# Altium PCB DIOT_Sampler.PCBDOC (part 7 of 8)
Units mm, origin at the board's own origin, x right, y up, seen from the top; angles counter-clockwise.
Board outline 221.17 x 100 mm, 4 copper layers (Top, GP1(GND), L3, Bot), stack 1.648 mm thick; 666 components, 413 nets, 2132 pads, 925 vias.
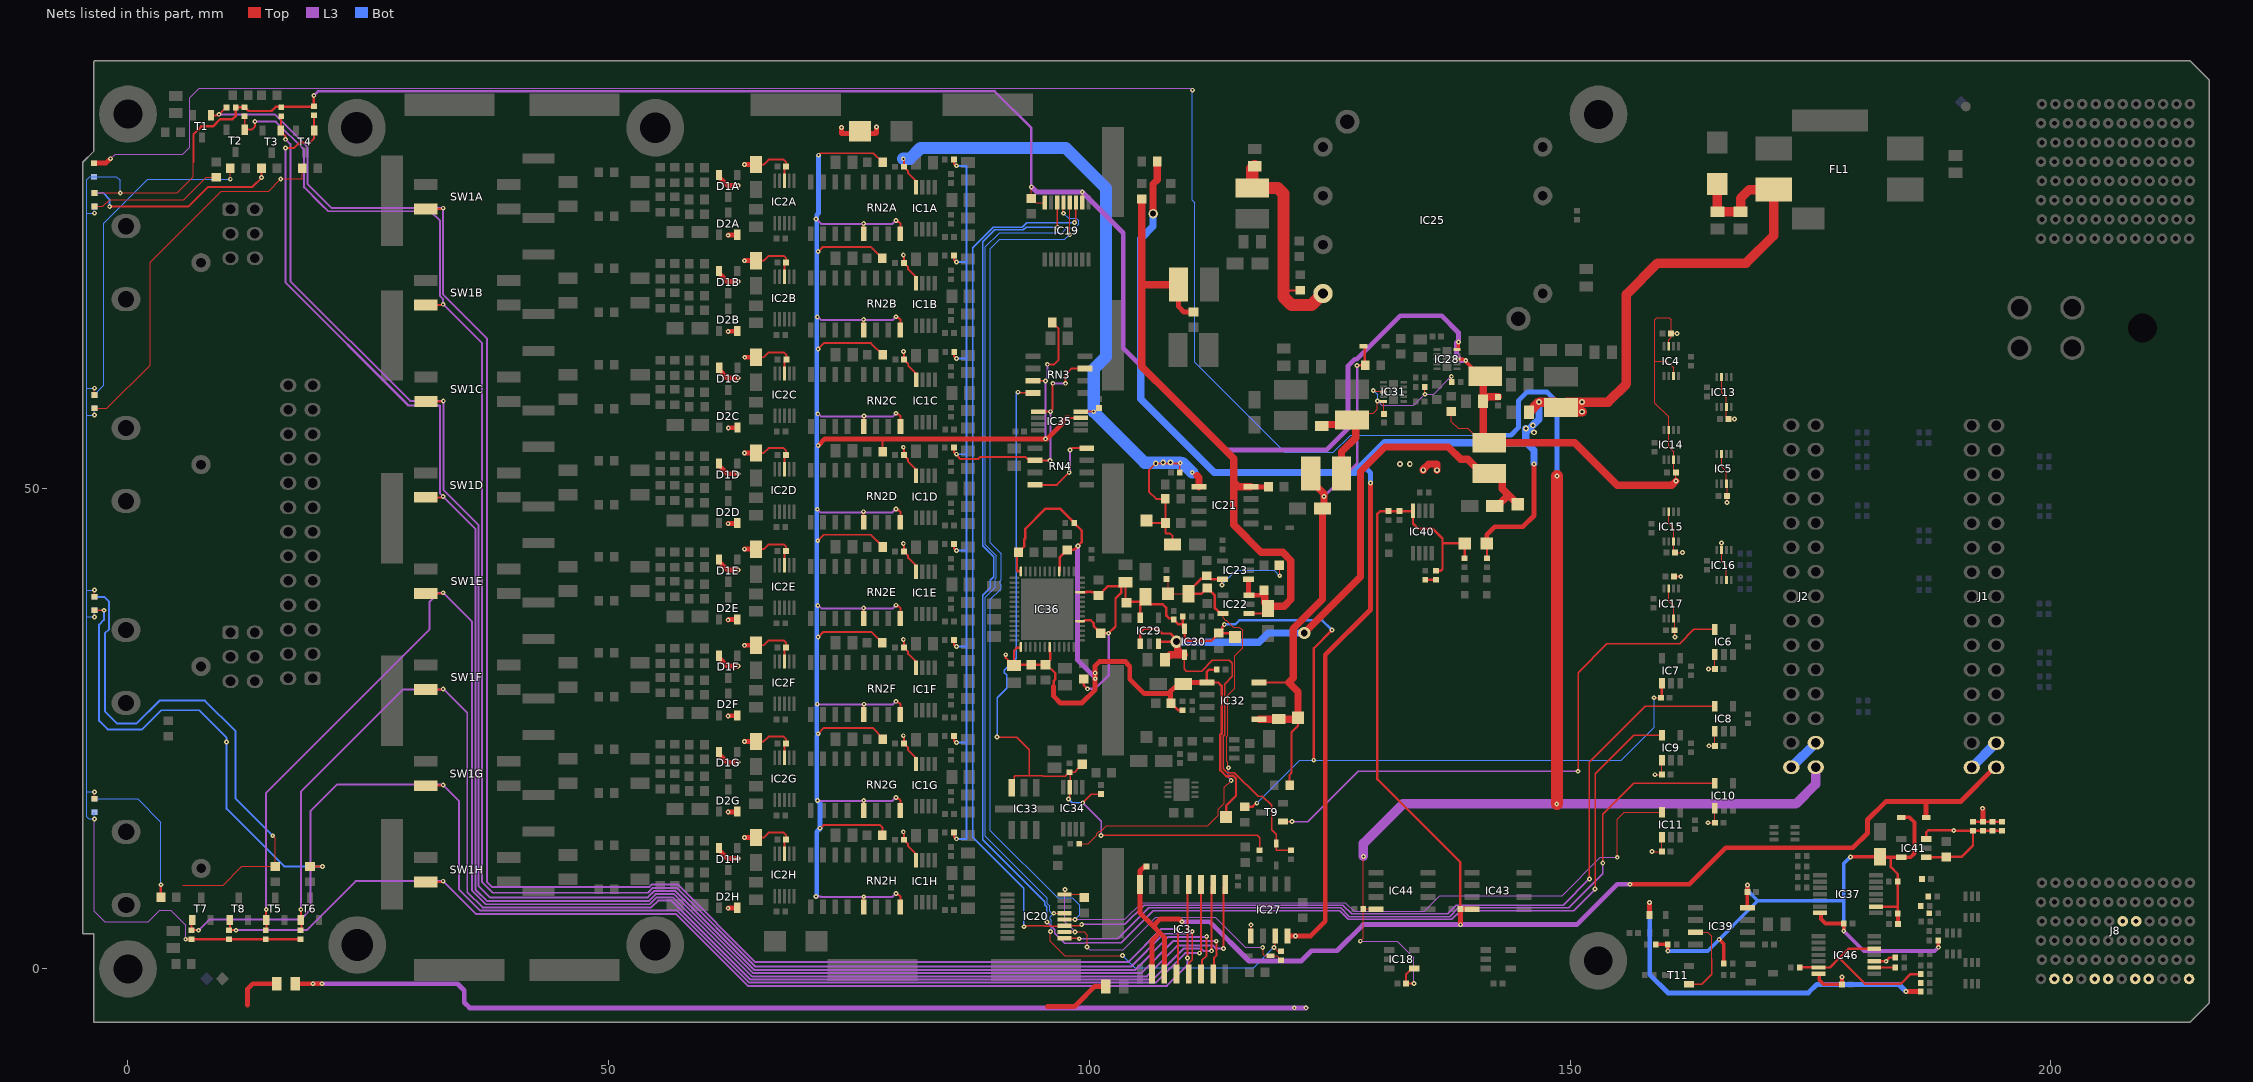
[diagram p8: the nets of this part, all layers, seen from the top]

## Via types
v1: diameter 0.5, hole 0.2, Top to Bot, tented both sides, 704 vias
v2: diameter 0.5, hole 0.2, Top to Bot, 180 vias
v3: diameter 0.6, hole 0.3, Top to Bot, tented both sides, 17 vias
v4: diameter 1, hole 0.6, Top to Bot, tented both sides, 16 vias
v5: diameter 0.6, hole 0.3, Top to Bot, 6 vias
v6: diameter 1.27, hole 0.711, Top to Bot, 2 vias

## Nets (pads, with @x,y where several pads share a name; then routed paths per layer and width w, separated by ;. In a path a pad name is that pad's centre, name@x,y a point inside that pad or via, vN(x,y) a via of type N, cw(c..) or ccw(c..) an arc to the next point about the centre after c; other vN are vias at no path point) (continued)
NetRN4_4: RN4.4 RN4.8 | length 8.3
  Top w0.203: RN4.8@94.319,50.35 96.614,50.35 v1(97.894,51.63) ; v1(97.969,53.955) 98.174,54.16 RN4.4@99.719,54.16
  L3 w0.203: v1(97.894,51.63) 97.969,51.705 v1(97.969,53.955)
O\E\: IC19.13 IC20.13 IC27.7 R65.2 | length 119.1
  Top w0.127: v1(95.944,3.88) 95.944,2.88 97.444,1.38 v1(103.444,1.38) ; v1(96.297,5.787) IC20.13@97.399,5.787 ; v1(97.304,78.595) IC19.13@97.304,79.697 ; IC27.7@119.329,3.43 119.329,2.365 v1(119.194,2.23) 119.574,1.85 R65.2@119.944,1.85
  Bot w0.127: v1(95.944,3.88) 96.025,3.961 96.025,5.062 95.944,5.144 95.944,5.434 v1(96.297,5.787) 96.037,5.787 95.852,5.972 95.852,6.55 95.602,6.799 95.602,7.362 89.186,13.779 89.186,38.635 90.223,39.672 90.223,40.597 90.321,40.696 90.321,42.974 89.186,44.109 89.186,56.879 89.189,56.882 89.189,57.478 89.186,57.481 89.186,75.122 90.648,76.584 97.166,76.584 97.656,77.074 98.511,77.074 98.885,77.448 98.885,77.812 98.626,78.07 97.828,78.07 v1(97.304,78.595) ; v1(103.444,1.38) 104.694,0.13 117.094,0.13 v1(119.194,2.23)
P2V5A: C16.2 C71.2 C75.2 C76.2 C77.1 C92.2 C93.2 C94.2 IC7.1 IC29.5 IC30.5 IC36.31 IC36.37 R70.2 R76.1 R77.1 TP10.1 | length 121.9
  Top w0.127: v2(158.725,28.2) C16.2@159.45,28.2
  Top w0.254: IC36.31@99.039,36.165 99.394,36.165 99.49,36.261 100.133,36.261 100.428,35.966 100.428,35.671 C93.2@101.194,34.905 v1(101.994,34.905) 102.713,35.624 102.713,38.54 103.329,39.155 C94.2@103.329,39.807 ; IC36.37@99.039,39.165 99.68,39.165 99.76,39.246 100.178,39.246 100.258,39.165 100.609,39.165 C92.2@100.944,38.83 100.969,38.83 101.946,39.807 C94.2@103.329,39.807 ; R77.1@99.394,30.155 99.394,29.53 v1(99.794,29.13) ; IC29.5@105.294,36.532 105.294,37.896 C77.1@105.817,38.419 ; C77.1@105.817,38.694 C77.1@105.817,38.663 ; R70.2@109.724,36.63 IC30.5@109.724,35.83 ; v1(114.032,35.83) 114.032,35.763 113.817,35.548 113.817,35.253 C75.2@113.469,34.905 ; TP10.1@115.136,34.52 114.751,34.905 C75.2@113.469,34.905 ; R76.1@116.159,16.864 116.974,16.864 117.346,17.236 v1(117.412,17.236) ; v2(123.328,21.704) 123.344,21.72 123.344,33.352 v2(125.226,35.234) ; C16.2@159.55,28.2 IC7.1@159.55,29.7 ; C94.2@103.329,39.807 C94.2@103.752,40.23 103.752,38.165 105.319,38.165 C77.1@105.817,38.663 ; C77.1@105.817,38.419 C77.1@105.817,38.663 ; C77.1@105.817,38.419 106.315,37.921 107.617,37.921 107.998,37.541 107.998,36.749 108.273,36.474 108.619,36.474 C76.2@108.771,36.322 109.263,35.83 IC30.5@109.724,35.83 ; IC30.5@109.724,35.83 109.724,35.55 IC30.5@109.895,35.379 109.895,34.429 110.194,34.13 112.694,34.13 C75.2@113.469,34.905
  L3 w0.254: v1(99.794,29.13) 100.594,29.13 101.994,30.53 v1(101.994,34.905)
  Bot w0.127: v1(117.412,17.236) 121.881,21.704 v2(123.328,21.704) 155.304,21.704 158.725,25.125 v2(158.725,28.2)
  Bot w0.254: v1(114.032,35.83) 115.169,35.83 115.594,36.255 124.205,36.255 v2(125.226,35.234)
P3V3: C17.2 C18.2 C19.2 C20.2 C21.2 C22.2 C23.2 C24.2 C25.2 C27.2 C28.2 C30.2 C32.2 C33.2 C69.2 C70.2 C123.2 D3.2 D4.2 D9.1 D19.2 D20.2 D21.2 D23.2 D24.2 D25.2 D26.2 IC4.3 IC4.7 IC5.3 IC5.7 IC6.1 IC8.1 IC9.1 IC10.1 IC11.1 IC13.3 IC13.7 IC14.3 IC14.7 IC15.3 IC15.7 IC16.3 IC16.7 IC17.3 IC17.7 IC19.10 IC19.16 IC20.10 IC20.16 IC27.5 IC28.8 IC28.10 IC46.14 L7.2 L8.1 R25.1 R27.1 R29.1 R31.1 R33.1 R36.1 R39.1 R43.1 R65.1 R66.2 | length 457.6
  Top w0.127: D26.2@-3.49,17.7 v2(-3.49,18.4) ; D23.2@-3.49,38.7 v2(-3.49,39.4) ; D20.2@-3.49,59.7 v2(-3.49,60.4) ; D3.2@-3.49,80.7 v2(-0.8,80.7) 5.1,80.7 6.814,82.414 6.814,83.952 ; v1(93.957,81.336) C32.2@93.957,80.136 94.396,79.697 IC19.16@95.354,79.697 ; IC20.10@97.399,3.837 v1(98.501,3.837) 99.437,3.837 99.769,3.505 99.769,2.305 v1(99.744,2.28) ; v1(97.444,8.262) 97.444,7.782 IC20.16@97.399,7.737 99.137,7.737 C33.2@99.444,7.43 ; IC19.10@99.254,79.697 v1(99.254,80.799) ; v1(118.019,2.23) 118.059,2.19 118.059,1.515 118.194,1.38 D9.1@118.834,1.38 119.474,1.38 R65.1@119.944,0.91 ; R66.2@138.077,57.583 137.691,57.97 R66.2@137.641,57.97 137.641,56.909 138.345,56.205 139.344,56.205 140.821,54.729 141.567,54.729 L8.1@141.571,54.729 ; v2(158.5,12.2) C18.2@159.55,12.2 IC11.1@159.55,13.7 ; v2(158.825,20.2) C20.2@159.55,20.2 IC9.1@159.55,21.7 ; IC17.7@160.25,39.55 160.25,38.25 160.75,37.75 IC17.3@160.75,36.45 160.867,36.333 C27.2@160.867,35.222 160.867,34.558 v1(160.9,34.525) ; IC15.7@160.25,47.55 160.246,47.546 160.246,46.305 160.75,45.801 IC15.3@160.75,44.45 160.75,43.415 160.917,43.247 160.976,43.305 v1(161.675,43.305) ; IC4.3@160.25,64.75 160.25,65.45 160.5,65.7 C23.2@160.5,66.1 ; IC4.7@160.75,61.65 160.75,62.5 160.05,63.2 158.825,63.2 ; v1(161.002,50.736) 161.002,51.606 C30.2@160.988,51.62 160.75,51.859 IC14.3@160.75,52.95 160.75,53.787 160.25,54.287 IC14.7@160.25,56.05 160.25,57.4 158.825,58.825 158.825,63.2 ; v2(161.1,66.1) C23.2@160.5,66.1 ; v2(164.325,15.2) C19.2@165.05,15.2 IC10.1@165.05,16.7 ; v2(164.4,31.2) C17.2@165.05,31.2 IC6.1@165.05,32.7 ; v2(164.45,23.2) C21.2@165.05,23.2 IC8.1@165.05,24.7 ; v1(165.75,44.308) IC16.7@165.75,43.55 165.746,43.546 165.746,42.382 166.25,41.878 IC16.3@166.25,40.45 ; IC5.7@165.75,53.55 165.75,52.25 166.25,51.75 IC5.3@166.25,50.45 166.318,50.383 C22.2@166.318,49.188 v2(166.318,48.518) ; IC13.7@165.75,61.55 165.75,59.9 166.25,59.4 IC13.3@166.25,58.45 166.25,57.399 C28.2@166.464,57.185 v2(167.094,57.185) ; 158.825,63.2 158.825,67.525 159.025,67.725 160.3,67.725 160.5,67.525 C23.2@160.5,66.1
  Top w0.152: IC27.5@116.789,3.43 116.794,3.435 v1(116.794,4.58)
  Top w0.203: C25.2@160.821,40.818 C25.2@160.823,40.818 v2(161.499,40.818)
  Top w0.254: v2(6,3.08) R39.1@6.63,3.08 R43.1@10.53,3.08 R33.1@14.33,3.08 R36.1@17.93,3.08 ; 6.814,83.952 6.814,86.809 7.635,87.63 8.847,87.63 9.593,88.376 10.89,88.376 11.219,88.705 11.219,89.575 R25.1@11.189,89.605 ; R25.1@11.189,89.625 R27.1@12.144,89.625 12.54,89.229 14.943,89.229 15.389,89.675 R31.1@19.33,89.675 ; R31.1@19.33,89.72 v1(19.33,90.85)
  Top w0.381: IC28.8@138.242,63.415 138.885,63.415 ; IC28.10@138.242,64.415 138.378,64.55 v1(138.378,65.215) ; v1@139.085,63.215 140.665,61.635 L7.2@141.165,61.635 ; IC46.14@175.831,-0.508 175.922,-0.598 175.922,-1.148 176.389,-1.615 C123.2@178.281,-1.615 ; v2(178.281,-0.848) C123.2@178.281,-1.615 ; C123.2@178.289,-1.615 C123.2@178.281,-1.615
  Top w0.762: v3(134.726,51.872) 134.726,51.95 135.28,52.505 136.149,52.505 v3(136.149,51.872) ; L7.2@141.165,61.635 140.948,61.417 C70.2@140.948,59.018 ; L8.1@141.567,54.729 140.948,55.348 C70.2@140.948,59.018 ; L8.1@141.571,54.729 150.472,54.729 154.901,50.3 160.566,50.3 v1(161.002,50.736) ; C69.2@142.512,59.494 141.423,59.494 C70.2@140.948,59.018
  L3 w0.127: v2(-3.49,15.6) -3.49,5.99 -2.4,4.9 2.1,4.9 3.295,6.095 4.448,6.095 6,4.543 v2(6,3.08) ; v1(97.444,8.262) 97.444,4.984 97.399,4.939 v1(98.501,3.837) ; v1(99.744,2.28) 100.05,1.974 103.523,1.974 106.898,5.349 113.1,5.349 116.219,2.23 v1(118.019,2.23)
  L3 w0.254: v1(19.33,90.85) 19.753,91.273 20.337,91.273 90.151,91.273 93.957,87.467 v1(93.957,81.336)
  L3 w0.508: v1@93.972,81.352 94.525,80.799 v1(99.254,80.799) 103.513,76.54 103.513,64.569 114.127,53.955 124.644,53.955 126.91,56.221 126.91,62.731 127.579,63.401 127.809,63.401 132.343,67.935 136.631,67.935 138.378,66.187 v1(138.378,65.215) ; v1@138.181,65.178 138.181,63.753 138.657,63.277 139.133,63.277 v1(139.141,63.27)
  Bot w0.127: D25.2@-3.49,16.3 v2(-3.49,15.6) -4.1,15.6 -4.3,15.8 -4.3,18.4 ; v2(-3.49,18.4) -4.3,18.4 ; D21.2@-3.49,37.3 v2(-3.49,36.6) -4.3,36.6 ; v2(-3.49,39.4) -4.3,39.4 ; D4.2@-3.49,58.3 v2(-3.49,57.6) -4.3,57.6 ; v2(-3.49,60.4) -4.3,60.4 ; D19.2@-3.49,79.3 v2(-3.49,78.6) -4.3,78.6 ; v2(-0.8,80.7) -0.8,82 -1.2,82.4 D24.2@-3.52,82.4 -4,82.4 -4.3,82.1 -4.3,78.6 ; -4.3,18.4 -4.3,36.6 ; -4.3,36.6 -4.3,39.4 ; -4.3,39.4 -4.3,57.6 ; -4.3,57.6 -4.3,60.4 ; -4.3,60.4 -4.3,78.6
  other v3: 132.299,52.505 133.328,52.505
P3V3_DIOT: C108.2 C110.2 C118.1 D17.2 IC37.2 IC37.14 IC39.8 IC41.5 R102.2 R103.2 R104.1 R107.1 R109.1 R110.1 R113.1 | length 74.5
  Top w0.254: IC37.2@181.801,6.475 184.071,6.475 ; 183.355,11.6 183.355,10.582 184.071,9.866 R109.1@184.071,9.075 184.071,6.475 ; R103.2@184.071,5.775 184.071,6.475
  Top w0.381: R113.1@158.96,2.49 R113.1@158.9,2.55 R110.1@160.16,2.55 v2(160.16,1.86) ; v2(165.501,3.074) 165.96,2.616 R102.2@165.96,0.55 ; IC39.8@168.435,6.35 IC39.8@168.43,6.355 168.43,7.98 C110.2@168.45,8 v2(168.45,8.725) ; IC37.14@176.001,5.825 176.091,5.734 176.091,5.185 176.559,4.718 C108.2@178.458,4.718 v2(178.458,3.95) ; v2(179.15,11.65) C118.1@182.23,11.65 182.28,11.6 183.355,11.6 IC41.5@184.43,11.6 185.397,11.6 185.807,12.01 185.807,15.253 185.306,15.754 D17.2@184.43,15.754 ; R103.2@184.071,5.775 184.1,5.746 R107.1@184.1,4.65 ; v2(188.3,2.245) R104.1@188.3,2.95
  L3 w0.381: v2(178.458,3.95) 180.548,1.86 187.915,1.86 v2(188.3,2.245)
  Bot w0.381: v2(160.16,1.86) 164.301,1.86 169.516,7.075 ; v2(168.45,8.725) 168.45,8.141 169.516,7.075 ; v2(178.458,3.95) 178.458,7.075 ; v2(179.15,11.65) 178.458,10.958 178.458,7.075 ; 169.516,7.075 178.458,7.075
P3V3_MP: C15.2 C113.2 C120.2 D17.1 IC3.2 IC3.3 IC3.16 IC40.8 IC43.8 J1.30 R114.2 R115.2 R119.2 TP15.1 | length 182.2
  Top w0.254: C113.2@132.21,47.62 R114.2@131.13,47.62 130.251,47.62 129.95,47.319 129.95,19.722 138.58,11.092 C120.2@138.58,6.25 C120.2@138.58,6.245 ; C113.2@132.23,47.6 133.605,47.6 IC40.8@133.655,47.65 133.655,46.325 134.192,45.789 135.677,45.789 136.722,44.744 136.722,44.271 ; R115.2@136.03,41.42 136.564,41.42 136.722,41.578 136.722,44.271 ; R119.2@139.03,42.72 TP15.1@139.03,44.25 136.744,44.25 136.722,44.271
  Top w0.508: C15.2@105.919,10.63 105.701,10.63 105.249,10.178 IC3.16@105.249,8.78 105.249,5.825 106.619,4.455 ; IC3.2@106.519,-0.52 106.519,2.955 107.319,3.755 ; IC3.3@107.789,-0.52 107.789,3.285 107.319,3.755 ; v1(109.619,4.905) 109.319,5.205 107.369,5.205 106.619,4.455 ; v2(138.58,4.598) 138.58,6.245 IC43.8@140.03,6.245 ; v2(156.227,8.8) 162.4,8.8 166.2,12.6 179.4,12.6 180.925,14.125 180.925,15.5 182.825,17.4 187.03,17.4 ; D17.1@187.03,15.754 187.03,17.4 ; J1.30@194.312,20.95 194.15,20.95 190.6,17.4 187.03,17.4 ; 106.619,4.455 107.319,3.755
  L3 w0.508: v1(109.619,4.905) 112.519,4.905 116.602,0.822 122.04,0.822 123.098,1.88 125.747,1.88 128.466,4.598 v2(138.58,4.598) 150.698,4.598 154.9,8.8 v2(156.227,8.8)
P3V3_MP2: C121.2 C122.2 D22.2 IC18.4 IC44.8 J2.30 | length 311.9
  Top w0.127: v2(128.173,2.88) 128.48,3.187 C122.2@128.48,6.25 ; v2(128.5,11.7) 128.48,11.68 C122.2@128.48,6.25 ; IC44.8@129.867,6.245 129.867,6.25 C122.2@128.48,6.25
  Top w0.203: v2(133.752,-1.507) 133.65,-1.507 133.65,-1.5 C121.2@132.95,-1.5 132.95,-0.55 133.55,0.05 IC18.4@133.8,0.05
  Top w0.508: D22.2@-3.52,83.8 -2.291,83.8 v2(-1.825,84.266)
  Top w1.27: v2@148.63,17.157 v2(148.63,51.25)
  L3 w0.127: v2(-1.825,84.266) -1.341,84.75 5.675,84.75 6.4,85.475 6.4,90.6 7.39,91.59 20.611,91.59 110.507,91.591 v1(110.707,91.391) ; v2(128.173,2.88) 132.02,2.88 133.752,1.148 v2(133.752,-1.507)
  L3 w1: v2(128.5,11.7) 128.5,13.05 132.607,17.157 v2(148.603,17.157) 173.468,17.157 175.542,19.231 J2.30@175.542,20.976
  Bot w0.127: v1(110.707,91.391) 110.707,79.93 110.944,79.693 110.944,63.08 120.294,53.73 125.381,53.73 127.156,55.505 140.783,55.505
  Bot w0.508: 140.783,55.505 143.847,55.505 144.62,56.278 144.62,59.088 145.552,60.02 147.578,60.02 148.648,58.95 148.648,51.268 v2(148.63,51.25)
P3V3A: C67.1 C68.2 D7.1 IC29.1 IC29.3 IC30.1 L8.2 R60.2 TP11.1 | length 98.2
  Top w0.152: IC30.1@109.895,32.679 109.869,32.654 109.869,31.194 110.083,30.98 111.695,30.98 112.795,32.08 114.569,32.08 114.869,31.78 114.869,30.42 114.077,29.628 114.077,24.335 113.941,24.198 113.941,20.803 114.323,20.42 115.087,20.42 117.549,17.959 117.99,17.959 118.94,17.009 118.94,14.484 119.444,13.98 D7.1@119.444,13.02 119.444,12.38 119.474,12.35 R60.2@120.944,12.35
  Top w0.254: IC29.1@105.294,33.832 105.294,34.994 105.681,35.381 107.037,35.381 107.538,34.88 108.425,34.88 109.059,34.246 v6(109.059,34.035) 107.342,34.035 107.194,33.887 IC29.3@107.194,33.832
  Top w0.762: C68.2@107.844,32.13 108.393,32.679 109.369,32.679 ; v6(109.059,34.035) 109.156,33.937 109.156,33.198 109.369,32.985 109.369,32.679 ; IC30.1@109.895,32.679 109.369,32.679 ; v6(122.345,34.932) 128.196,40.782 128.196,51.726 130.75,54.28 137.33,54.28 138.611,52.999 139.35,52.999 140.821,51.529 L8.2@141.571,51.529 142.321,51.529 142.94,50.91 142.94,49.948 143.558,49.33 ; C67.1@142.169,48.164 142.444,48.164 143.558,49.277 143.558,49.33 ; TP11.1@144.558,48.33 143.558,49.33
  Bot w0.762: v6(109.059,34.035) 109.114,33.98 117.641,33.98 118.593,34.932 v6(122.345,34.932)
P5V0A: C82.2 C83.2 C84.1 C87.2 C88.2 C89.2 C90.2 C91.2 IC32.1 IC36.15 IC36.21 IC36.44 IC36.52 R73.2 R78.2 TP13.1 | length 90.4
  Top w0.254: v1(91.294,32.68) 91.294,32.365 92.102,31.557 C91.2@92.155,31.557 ; C90.2@92.465,43.33 92.465,41.409 92.534,41.34 IC36.52@92.864,41.34 ; C90.2@92.619,43.33 93.244,43.955 93.244,44.68 93.344,44.78 93.344,45.78 95.444,47.88 96.944,47.88 98.414,46.41 R78.2@98.414,46.38 99.198,45.596 99.198,44.384 v1(98.796,43.982) 98.394,43.58 C88.2@97.694,43.58 96.894,42.78 96.894,41.37 IC36.44@96.864,41.34 ; IC36.15@92.864,33.49 92.754,33.38 92.444,33.38 92.155,33.091 C91.2@92.155,31.557 ; IC36.21@95.864,33.49 95.864,32.948 95.944,32.867 95.944,32.147 95.498,31.701 C87.2@95.432,31.635 ; 96.269,29.358 96.269,29.93 96.444,30.105 96.444,30.755 95.564,31.635 C87.2@95.432,31.635 ; C82.2@108.494,27.63 109.214,26.91 R73.2@109.694,26.91 ; C83.2@113.244,31.13 112.444,31.13 112.194,30.88 112.194,29.835 IC32.1@112.244,29.785 113.4,29.785 113.747,29.438 113.747,24.472 113.611,24.335 113.611,20.666 114.238,20.039 114.482,20.039 114.533,20.09 114.95,20.09 115.246,19.795 115.246,18.002 114.238,16.994 114.238,15.823 TP13.1@114.206,15.792 ; C91.2@92.155,31.557 92.233,31.635 C89.2@93.933,31.635 C87.2@95.432,31.635
  Top w0.508: 96.269,29.358 96.269,28.35 96.964,27.655 99.211,27.655 100.597,29.041 100.597,30.179 v1(100.597,30.787) 100.597,31.533 101.025,31.961 103.752,31.961 103.975,31.738 103.975,31.674 104.194,31.455 104.194,30.13 105.7,28.624 108.202,28.624 108.425,28.847 ; C82.2@108.494,27.63 108.425,27.699 108.425,28.624 108.425,28.847 ; IC32.1@112.244,29.785 109.899,29.785 109.373,29.259 108.837,29.259 108.425,28.847
  L3 w0.508: v1(98.796,43.982) 98.744,43.93 98.744,32.14 100.597,30.287 v1@100.597,30.13
  other v1: 100.607,30.179
P6V0: C78.2 C79.2 IC31.8 IC31.10 L9.2 L10.1 R69.2 R72.2 | length 28.2
  Top w0.127: L9.2@127.547,57.113 127.547,57.79 129.523,57.79 129.95,58.217 v1@129.95,58.979 ; v1(129.523,60.17) 129.594,60.098 130.229,60.098 130.241,60.087 130.241,60.055 130.556,60.055 IC31.8@130.591,60.02 ; v1@130.209,59.02 IC31.10@130.591,59.02 130.591,57.72 C78.2@130.641,57.72 ; R72.2@134.861,60.52 134.861,59.8 v1(134.891,59.77) ; v1(137.641,61.615) 137.671,61.585 R69.2@137.671,61.02
  Top w0.762: C79.2@124.161,56.47 124.305,56.614 126.695,56.614 L9.2@127.176,57.095 ; L10.1@126.226,51.53 126.226,53.779 127.694,55.247 127.694,56.929 L9.2@127.529,57.095
  L3 w0.127: v1@129.991,59.02 130.406,58.604 133.725,58.604 v1(134.891,59.77) 135.796,59.77 v1(137.641,61.615)
  Bot w0.127: v1(129.523,60.17) 129.976,59.717 v1(129.976,59.058)
P6V0A: C80.1 C81.2 D8.1 IC32.5 IC32.8 L10.2 R53.2 R64.2 TP12.1 | length 60
  Top w0.203: IC32.8@117.644,29.785 120.51,29.785 ; R53.2@120.819,19.08 120.819,20.18 121.019,20.38 121.019,24.605 121.694,25.28 TP12.1@121.694,26.13
  Top w0.254: v1(127.841,62.77) R64.2@128.648,62.77 ; D8.1@128.501,64.77 128.545,64.77 128.648,64.667 128.648,62.838 R64.2@128.691,62.795
  Top w0.762: IC32.5@117.644,25.975 C81.2@119.694,25.975 ; C81.2@119.694,25.98 C81.2@119.694,25.975 ; L10.2@123.026,51.53 123.026,50.774 124.394,49.406 v1(124.394,49.13) 124.394,48.03 C80.1@124.244,47.88 ; C80.1@124.244,47.636 124.244,38.447 121.202,35.405 121.202,30.26 120.727,29.785 121.694,28.818 TP12.1@121.694,26.13 121.539,25.975 C81.2@119.694,25.975
  L3 w0.254: v1(124.394,49.13) 127.841,52.577 v1(127.841,62.77)
P12V0: C57.2 C114.2 C115.2 D16.1 FL1.2 IC27.8 J1.28 J1.29 J2.28 J2.29 L4.1 R86.2 R100.2 R118.2 R154.2 R155.2 R156.2 TP14.1 | length 213.3
  Top w0.203: R118.2@141.33,42.72 TP14.1@141.33,44.25
  Top w0.254: R156.2@191.899,15.311 R155.2@192.92,15.311 R154.2@193.942,15.311 R100.2@194.94,15.311
  Top w0.508: IC27.8@120.599,3.43 v2(121.439,3.43) 123.01,3.43 124.53,4.95 124.53,32.656 129.23,37.356 v2(129.23,50.55) ; TP14.1@141.33,44.25 141.33,45.143 142.169,45.983 145.091,45.983 146.244,47.136 v2(146.244,52.505) ; v2(192.9,16.7) 192.92,16.68 R155.2@192.92,15.311
  Top w0.762: v4(106.619,78.555) 106.619,81.63 107.044,82.055 R86.2@107.044,83.98
  Top w1: C57.2@145.704,57.872 146.782,58.95 148.493,58.95 L4.1@149.048,58.395 ; v3(151.23,57.95) 149.493,57.95 L4.1@149.048,58.395 ; D16.1@165.3,81.65 165.3,78.78 C114.2@165.33,78.75 C115.2@167.73,78.75 167.73,80.15 168.63,81.05 FL1.2@171.175,81.05 171.175,76.275 168.3,73.4 159.1,73.4 155.85,70.15 155.85,60.85 153.95,58.95 v3(151.23,58.95) 149.603,58.95 L4.1@149.048,58.395
  Bot w0.508: 128.394,52.43 129.23,51.594 v2(129.23,50.55)
  Bot w0.762: v4(106.619,78.555) 106.619,77.244 105.325,75.95 105.325,59.275 106.475,58.125 112.97,51.63 120.494,51.63 127.594,51.63 128.394,52.43 130.693,54.729 145.461,54.729 146.244,53.946 v2(146.244,52.505) ; 145.394,54.729 v3(145.394,56.205) ; v3@145.594,56.005 145.894,56.305 ; v3(146.119,56.53) 146.769,57.18 v3(146.769,58.95)
  Bot w1: J2.29@173.002,20.976 J2.28@175.542,23.516 ; J1.29@191.772,20.95 J1.28@194.312,23.49
  other v3: 146.244,55.805
P12V0_DIOT: C117.2 IC41.1 IC41.3 J8.A1 J8.D1 J8.E1 J8.G1 J8.H1 J8.J1 J8.K1 R100.1 R154.1 R155.1 R156.1 | length 15.6
  Top w0.254: IC41.1@187.03,11.6 189.08,11.6 C117.2@189.13,11.65 190.716,11.65 191.899,12.833 R156.1@191.899,14.371 ; IC41.3@187.03,13.5 187.03,14.182 187.248,14.4 v2(189.9,14.4) 189.929,14.371 R156.1@191.899,14.371 ; R100.1@194.94,14.371 R154.1@193.942,14.371 R155.1@192.92,14.371 R156.1@191.899,14.371
P12V0A: C8A.1 C8B.1 C8C.1 C8D.1 C8E.1 C8F.1 C8G.1 C8H.1 C9A.2 C9B.2 C9C.2 C9D.2 C9E.2 C9F.2 C9G.2 C9H.2 C13A.2 C13B.2 C13C.2 C13D.2 C13E.2 C13F.2 C13G.2 C13H.2 C38.1 C39.2 C40.2 C104.2 D1A.2 D1B.2 D1C.2 D1D.2 D1E.2 D1F.2 D1G.2 D1H.2 D2A.2 D2B.2 D2C.2 D2D.2 D2E.2 D2F.2 D2G.2 D2H.2 D5.1 IC1A.8 IC1B.8 IC1C.8 IC1D.8 IC1E.8 IC1F.8 IC1G.8 IC1H.8 IC2A.8 IC2B.8 IC2C.8 IC2D.8 IC2E.8 IC2F.8 IC2G.8 IC2H.8 IC21.1 IC35.8 R51.2 TP7.1 | length 193.8
  Top w0.203: C8H.1@65.329,13.658 66.129,13.658 66.632,14.161 68.199,14.161 68.465,13.895 C9H.2@68.465,13.448 68.275,13.258 IC2H.8@68.275,11.967 ; C8G.1@65.329,23.658 66.129,23.658 66.632,24.161 68.199,24.161 68.465,23.895 C9G.2@68.465,23.448 68.275,23.258 IC2G.8@68.275,21.967 ; C8F.1@65.329,33.658 66.129,33.658 66.632,34.161 68.199,34.161 68.465,33.895 C9F.2@68.465,33.448 68.275,33.258 IC2F.8@68.275,31.967 ; C8E.1@65.329,43.658 66.129,43.658 66.632,44.161 68.199,44.161 68.465,43.895 C9E.2@68.465,43.448 68.275,43.258 IC2E.8@68.275,41.967 ; C8D.1@65.329,53.658 66.129,53.658 66.632,54.161 68.199,54.161 68.465,53.895 C9D.2@68.465,53.448 68.275,53.258 IC2D.8@68.275,51.967 ; C8B.1@65.329,73.658 66.129,73.658 66.632,74.161 68.199,74.161 68.465,73.895 C9B.2@68.465,73.448 68.275,73.258 IC2B.8@68.275,71.967 ; C8A.1@65.329,83.658 66.129,83.658 66.632,84.161 68.199,84.161 68.465,83.895 C9A.2@68.465,83.448 68.275,83.258 IC2A.8@68.275,81.967 ; C8C.1@65.341,63.614 66.141,63.614 66.645,64.117 68.212,64.117 68.478,63.851 C9C.2@68.478,63.404 68.288,63.214 IC2C.8@68.288,61.923 ; v1(80.644,14.255) 80.694,14.205 C13H.2@80.694,13.43 81.144,12.98 81.144,12.755 81.969,11.93 IC1H.8@81.969,11.309 ; v1(80.644,24.255) 80.694,24.205 C13G.2@80.694,23.43 81.144,22.98 81.144,22.755 81.969,21.93 IC1G.8@81.969,21.309 ; v1(80.644,34.255) 80.694,34.205 C13F.2@80.694,33.43 81.144,32.98 81.144,32.755 81.969,31.93 IC1F.8@81.969,31.309 ; v1(80.644,44.255) 80.694,44.205 C13E.2@80.694,43.43 81.144,42.98 81.144,42.755 81.969,41.93 IC1E.8@81.969,41.309 ; v1(80.644,54.255) 80.694,54.205 C13D.2@80.694,53.43 81.144,52.98 81.144,52.755 81.969,51.93 IC1D.8@81.969,51.309 ; v1(80.644,74.255) 80.694,74.205 C13B.2@80.694,73.43 81.144,72.98 81.144,72.755 81.969,71.93 IC1B.8@81.969,71.309 ; v1(80.644,84.255) 80.694,84.205 C13A.2@80.694,83.43 81.144,82.98 81.144,82.755 81.969,81.93 IC1A.8@81.969,81.309 ; v1(80.657,64.211) 80.707,64.161 C13C.2@80.707,63.386 81.157,62.936 81.157,62.711 81.982,61.886 IC1C.8@81.982,61.265 ; IC35.8@99.094,57.955 v1(100.444,57.955) 100.619,57.955 C104.2@101.019,58.355 ; TP7.1@105.944,46.63 106.194,46.38 C40.2@107.894,46.38 ; C38.1@108.644,44.13 108.644,45.03 108.394,45.28 107.994,45.28 107.894,45.38 C40.2@107.894,46.38 ; C39.2@109.394,51.63 109.394,52.58 v3(106.894,52.58) 106.194,51.88 106.194,49.63 106.944,48.88 R51.2@107.894,48.88 C40.2@107.894,46.38 ; v1(110.694,51.63) 111.132,51.192
  Top w0.508: D1H.2@61.483,12.568 61.483,12.338 62.327,11.494 v1(63.457,11.494) ; D1G.2@61.483,22.568 61.483,22.338 62.327,21.494 v1(63.457,21.494) ; D1F.2@61.483,32.568 61.483,32.338 62.327,31.494 v1(63.457,31.494) ; D1E.2@61.483,42.568 61.483,42.338 62.327,41.494 v1(63.457,41.494) ; D1D.2@61.483,52.568 61.483,52.338 62.327,51.494 v1(63.457,51.494) ; D1B.2@61.483,72.568 61.483,72.338 62.327,71.494 v1(63.457,71.494) ; D1A.2@61.483,82.568 61.483,82.338 62.327,81.494 v1(63.457,81.494) ; D1C.2@61.496,62.524 61.496,62.294 62.339,61.45 v1(63.47,61.45) ; v1(62.428,6.304) 62.446,6.322 D2H.2@63.338,6.322 ; v1(62.428,16.304) 62.446,16.322 D2G.2@63.338,16.322 ; v1(62.428,26.304) 62.446,26.322 D2F.2@63.338,26.322 ; v1(62.428,36.304) 62.446,36.322 D2E.2@63.338,36.322 ; v1(62.428,46.304) 62.446,46.322 D2D.2@63.338,46.322 ; v1(62.428,66.304) 62.446,66.322 D2B.2@63.338,66.322 ; v1(62.428,76.304) 62.446,76.322 D2A.2@63.338,76.322 ; v1(62.44,56.26) 62.459,56.278 D2C.2@63.35,56.278 ; v1(64.135,13.653) 64.14,13.658 C8H.1@65.329,13.658 ; v1(64.135,23.653) 64.14,23.658 C8G.1@65.329,23.658 ; v1(64.135,33.653) 64.14,33.658 C8F.1@65.329,33.658 ; v1(64.135,43.653) 64.14,43.658 C8E.1@65.329,43.658 ; v1(64.135,53.653) 64.14,53.658 C8D.1@65.329,53.658 ; v1(64.135,73.653) 64.14,73.658 C8B.1@65.329,73.658 ; v1(64.135,83.653) 64.14,83.658 C8A.1@65.329,83.658 ; v1(64.148,63.609) 64.152,63.614 C8C.1@65.341,63.614 ; v1(74.22,87.498) 74.22,86.88 77.776,86.88 77.852,86.956 v1(77.852,87.549)
  Top w0.762: 111.219,51.28 111.393,51.106 IC21.1@111.393,50.134
  Bot w1.27: v1(80.644,84.255) 81.319,84.255 82.444,85.38 97.544,85.38 101.725,81.199 101.725,63.661 100.444,62.38 v1(100.444,57.955) 105.757,52.642 106.894,52.642 107.669,52.642 108.444,52.642 109.432,52.642 v1(109.444,52.63) 109.694,52.63 v1(110.694,51.63)
  other v3: 107.669,52.68 108.444,52.68
P13V0: C37.2 C43.2 C47.1 C51.2 IC21.8 IC22.1 IC22.3 IC23.1 L3.2 R41.2 | length 71.4
  Top w0.254: IC22.1@116.598,36.96 118.1,36.96 118.598,37.458 C47.1@118.598,37.476
  Top w0.508: L3.2@109.279,71.171 109.279,68.871 109.824,68.326 C51.2@110.815,68.326 ; IC23.1@116.548,40.514 116.548,38.881 116.569,38.86 IC22.3@116.59,38.86 ; IC22.3@116.598,38.86 118.051,38.86 ; IC21.8@116.798,50.13 C37.2@118.644,50.13 ; C43.2@118.144,39.371 118.051,39.279 118.051,38.86 ; 118.223,38.688 118.051,38.86
  Top w0.762: R41.2@105.444,80.08 105.444,71.171 L3.2@109.271,71.171 ; 105.448,71.171 105.448,62.633 108.531,59.551 114.998,53.083 114.998,50.601 ; IC21.8@116.789,50.13 115.469,50.13 114.998,50.601 ; 118.223,38.688 118.223,38.076 118.594,37.705 C47.1@118.594,37.48 118.84,37.726 120.248,37.726 120.944,38.421 120.944,42.474 120.092,43.326 117.849,43.326 114.998,46.177 114.998,50.601
P13V0S: C48.2 IC25.7 L2.1 R56.2 | length 23.6
  Top w0.203: 120.194,69.88 120.894,70.58 R56.2@121.944,70.58
  Top w1.27: C48.2@117.194,83.48 116.944,83.23 L2.1@116.944,81.23 119.594,81.23 120.194,80.63 120.194,69.88 121.022,69.052 123.101,69.052 IC25.7@124.294,70.245
PE_CLK_N: J8.F4
PE_CLK_P: J8.E4
PGIA-CS: IC11.5 IC19.12 IC20.12 | length 157.8
  Top w0.127: IC20.12@97.399,5.137 v1(98.501,5.137) ; v1(97.944,76.38) 97.954,76.39 IC19.12@97.954,79.697 ; v1(154.9,11.6) 154.9,15.585 155.615,16.3 IC11.5@159.55,16.3
  L3 w0.127: v1(98.501,5.137) 103.681,5.137 105.44,6.896 126.601,6.896 127.52,5.977 134.81,5.977 136.463,7.63 149.177,7.63 153.147,11.6 v1(154.9,11.6)
  Bot w0.127: v1(97.944,76.38) 97.444,75.88 90.694,75.88 89.694,74.88 89.694,57.692 89.697,57.689 89.697,56.671 89.694,56.668 89.694,44.319 90.829,43.184 90.829,40.486 90.731,40.387 90.731,40.005 90.829,39.907 90.829,39.56 89.694,38.425 89.694,14.38 96.694,7.38 98.219,7.38 98.969,6.63 98.969,5.605 v1(98.501,5.137)
PGIA-MISO: IC10.5 IC20.9 | length 78.8
  Top w0.152: IC20.9@97.399,3.187 98.887,3.187 v1(98.944,3.13) ; v1(153.4,11) 153.4,16.1 156.6,19.3 IC10.5@165.05,19.3
  L3 w0.152: v1(98.944,3.13) 102.944,3.13 106.164,6.35 126.126,6.35 127.046,5.431 137.459,5.431 138.378,6.35 149.85,6.35 153.4,9.9 v1(153.4,11)
PGIA-MOSI: IC9.5 IC19.14 | length 167.3
  Top w0.152: IC19.14@96.654,79.697 96.654,77.17 v1(96.694,77.13) ; v1(152.6,8.3) 152.6,20.3 156.6,24.3 IC9.5@159.55,24.3
  L3 w0.152: v1(95.585,4.88) 96.397,4.068 96.397,3.708 97.444,2.662 99.485,2.662 99.556,2.733 103.313,2.733 106.65,6.07 126.011,6.07 126.93,5.151 137.698,5.151 138.617,6.07 150.37,6.07 v1(152.6,8.3)
  Bot w0.152: v1(95.585,4.88) 95.585,6.439 95.336,6.688 95.336,6.988 88.919,13.405 88.919,38.88 89.694,39.655 89.694,40.446 90.054,40.807 90.054,42.863 88.919,43.998 88.919,56.989 88.922,56.992 88.922,57.368 88.919,57.371 88.919,75.605 90.165,76.851 93.14,76.851 93.419,77.13 v1(96.694,77.13)
PGIA-SCK: IC8.5 IC19.11 IC20.11 | length 175.9
  Top w0.152: v1(93.194,4.38) 93.301,4.487 95.337,4.487 95.397,4.427 97.339,4.427 IC20.11@97.399,4.487 99.051,4.487 v1(99.194,4.63) ; v1(98.444,77.63) 98.604,77.79 IC19.11@98.604,79.697 ; v1(152,9.36) 152,21.5 157.8,27.3 IC8.5@165.05,27.3
  L3 w0.152: v1(99.194,4.63) 103.684,4.63 105.683,6.629 126.371,6.629 127.29,5.71 137.258,5.71 138.178,6.629 149.27,6.629 v1(152,9.36)
  Bot w0.152: v1(93.194,4.38) 93.194,8.38 87.891,13.683 87.891,75.006 90.015,77.13 93.024,77.13 93.477,77.583 98.397,77.583 v1(98.444,77.63)
PSU_EN: R115.1 R116.2 | length 1.1
  Top w0.254: R116.2@134.93,40.48 R115.1@136.03,40.48
REF_P1V7066: IC35.7 R7A.1 R7B.1 R7C.1 R7D.1 R7E.1 R7F.1 R7G.1 R7H.1 R83.2 RN2A.5 RN2A.8 RN2B.5 RN2B.8 RN2C.5 RN2C.8 RN2D.5 RN2D.8 RN2E.5 RN2E.8 RN2F.5 RN2F.8 RN2G.5 RN2G.8 RN2H.5 RN2H.8 RN3.7 | length 263.8
  Top w0.203: v1(71.744,44.53) 72.369,45.155 77.269,45.155 78.494,43.93 R7E.1@78.494,43.88 ; v1(71.79,24.455) 72.39,25.055 77.444,25.055 78.494,24.005 R7G.1@78.494,23.88 ; v1(71.79,34.505) 72.34,35.055 77.319,35.055 R7F.1@78.469,33.905 ; v1(71.79,64.48) 72.39,65.08 77.269,65.08 R7C.1@78.494,63.855 ; v1(71.79,74.605) 72.29,75.105 77.269,75.105 R7B.1@78.469,73.905 ; v1(71.819,84.63) 72.023,84.834 77.54,84.834 R7A.1@78.494,83.88 ; v1(71.973,14.631) 72.02,14.631 72.344,14.955 78.244,14.955 78.469,14.73 R7H.1@78.469,13.88 ; v1(76.494,47.555) 76.524,47.525 RN2D.5@76.524,46.455 ; v1(76.519,37.53) 76.524,37.525 RN2E.5@76.524,36.455 ; v1(76.519,67.53) 76.524,67.525 RN2B.5@76.524,66.455 ; v1(76.519,77.53) 76.524,77.525 RN2A.5@76.524,76.455 ; RN2H.5@76.524,6.455 v1(76.524,7.5) ; RN2G.5@76.524,16.455 v1(76.524,17.51) ; RN2F.5@76.524,26.455 76.524,27.485 v1(76.569,27.53) ; RN2C.5@76.537,56.412 76.537,57.498 v1(76.544,57.505) ; R7D.1@78.494,53.805 78.494,55.054 78.569,55.129 ; v1(79.869,7.83) 80.019,7.68 80.194,7.68 80.334,7.54 RN2H.8@80.334,6.455 ; v1(79.869,17.83) 80.019,17.68 80.194,17.68 80.334,17.54 RN2G.8@80.334,16.455 ; v1(79.869,27.83) 80.019,27.68 80.194,27.68 80.334,27.54 RN2F.8@80.334,26.455 ; v1(79.869,37.83) 80.019,37.68 80.194,37.68 80.334,37.54 RN2E.8@80.334,36.455 ; v1(79.869,47.83) 80.019,47.68 80.194,47.68 80.334,47.54 RN2D.8@80.334,46.455 ; v1(79.869,67.83) 80.019,67.68 80.194,67.68 80.334,67.54 RN2B.8@80.334,66.455 ; v1(79.869,77.83) 80.019,77.68 80.194,77.68 80.334,77.54 RN2A.8@80.334,76.455 ; v1(79.882,57.786) 80.032,57.636 80.207,57.636 80.347,57.496 RN2C.8@80.347,56.412 ; RN3.7@94.144,61.17 95.379,61.17 v1(95.419,61.13) ; v1(95.619,62.88) 96.344,62.88 96.794,63.33 96.794,66.58 R83.2@96.144,67.23 ; 97.842,57.305 IC35.7@99.094,57.305
  Top w0.508: v1(71.79,54.43) 72.489,55.129 78.569,55.129 95.618,55.129 97.138,56.649 97.138,56.816 97.627,57.305 97.842,57.305
  L3 w0.203: v1(71.569,7.53) 72.044,7.53 72.094,7.48 79.519,7.48 v1(79.869,7.83) ; v1(71.569,78.005) 72.094,77.48 79.519,77.48 v1(79.869,77.83) ; v1(71.694,27.53) 71.744,27.48 79.519,27.48 v1(79.869,27.83) ; v1(71.698,47.808) 72.025,47.48 79.519,47.48 v1(79.869,47.83) ; v1(71.723,17.506) 71.749,17.48 79.519,17.48 v1(79.869,17.83) ; v1@71.732,67.842 72.094,67.48 79.519,67.48 v1(79.869,67.83) ; v1@71.779,57.764 72.107,57.436 79.532,57.436 v1(79.882,57.786) ; v1@71.793,37.827 72.14,37.48 79.519,37.48 v1(79.869,37.83) ; v1(95.419,55.13) v1(95.419,61.13) 95.619,61.33 v1(95.619,62.88)
  Bot w0.508: v1(71.569,7.53) 71.638,7.599 71.638,14.266 71.973,14.601 v1(71.973,14.631) 71.973,17.256 v1(71.723,17.506) 71.638,17.591 71.638,24.303 v1(71.79,24.455) 71.638,24.607 71.638,44.53 71.638,54.278 v1(71.79,54.43) 71.638,54.582 71.638,64.48 71.638,78.416 71.819,78.597 v1(71.819,84.63)
  other v1: 71.748,37.782 71.748,57.733 71.698,67.809
REF_P2V048: IC35.1 R13A.1 R13B.1 R13C.1 R13D.1 R13E.1 R13F.1 R13G.1 R13H.1 RN3.3 RN4.6 | length 108.4
  Top w0.203: R13H.1@85.914,14.205 85.914,13.735 86.144,13.505 v1(86.169,13.53) ; R13G.1@85.914,24.205 85.914,23.735 86.144,23.505 v1(86.169,23.53) ; R13F.1@85.914,34.205 85.914,33.735 86.144,33.505 v1(86.169,33.53) ; R13E.1@85.914,44.205 85.914,43.735 86.144,43.505 v1(86.169,43.53) ; R13D.1@85.914,54.205 85.914,53.735 86.4,53.249 86.4,53.187 86.534,53.053 88.442,53.053 88.619,53.23 93.369,53.23 93.709,52.89 RN4.6@94.319,52.89 95.884,52.89 v1(95.894,52.88) ; R13B.1@85.914,74.205 85.914,73.735 86.144,73.505 v1(86.169,73.53) ; R13A.1@85.914,84.205 85.914,83.735 86.144,83.505 v1(86.169,83.53) ; R13C.1@85.927,64.161 85.927,63.691 86.157,63.461 v1(86.182,63.486) ; IC35.1@94.694,57.955 v1(95.944,57.955) 96.144,58.155 96.144,60.855 v1(96.194,60.905) ; v1(97.519,60.905) 97.519,61.83 98.129,62.44 RN3.3@99.544,62.44
  L3 w0.203: v1(95.894,52.88) 95.944,52.93 v1(95.944,57.955) ; v1(96.194,60.905) v1(97.519,60.905)
  Bot w0.203: v1@86.233,13.526 87.194,13.526 87.194,23.526 ; v1@86.233,23.526 87.194,23.526 ; v1@86.233,33.526 87.194,33.526 ; v1@86.233,43.526 87.194,43.526 ; v1@86.233,53.526 87.194,53.526 ; v1@86.233,73.526 87.194,73.526 ; v1@86.233,83.526 87.194,83.526 87.194,73.526 ; v1@86.246,63.482 87.194,63.482 ; 87.194,23.526 87.194,33.526 ; 87.194,33.526 87.194,43.526 ; 87.194,43.526 87.194,53.526 ; 87.194,53.526 87.194,63.482 ; 87.194,63.482 87.194,73.526
  other v1: 86.169,53.53
REF_P4V096: C100.2 IC33.7 IC34.7 R59.1 R81.1 R82.2 RN3.8 | length 82.7
  Top w0.152: v1(90.394,24.105) 92.427,24.105 93.73,22.802 93.73,20.076 ; IC33.7@91.924,18.834 92.198,19.108 92.198,19.987 92.287,20.076 93.73,20.076 ; v1(92.569,59.98) 92.649,59.9 RN3.8@94.144,59.9 ; v1(97.814,17.67) 97.944,17.8 IC34.7@97.944,18.905 97.982,18.943 97.982,20.435 R81.1@97.948,20.468 ; C100.2@99.269,21.28 99.244,21.28 98.845,20.881 98.845,20.856 98.457,20.468 R81.1@97.948,20.468 ; v1(99.306,17.286) 100.206,18.185 R82.2@101.219,18.185 ; v1(101.219,13.88) 117.444,13.88 117.694,13.63 117.694,12.68 ; 93.73,20.076 95.173,20.076 95.221,20.028 97.488,20.028 97.928,20.468 R81.1@97.948,20.468
  L3 w0.152: v1(99.306,17.286) 101.219,15.372 v1(101.219,13.88)
  Bot w0.152: v1(90.394,24.105) 90.394,28.196 91.397,29.199 91.397,30.568 91.155,30.809 91.155,31.066 92.394,32.305 92.394,44.689 92.397,44.692 92.397,45.068 92.394,45.071 92.394,59.805 v1(92.569,59.98) ; v1(97.814,17.67) 98.226,17.258 99.278,17.258 v1(99.306,17.286)
REF_VCC: C41.2 C42.2 C44.1 C45.2 IC22.5 IC23.5 R54.2 R80.1 TP8.1 | length 62.1
  Top w0.127: R80.1@98.952,13.013 99.902,13.013 100.779,13.889 100.779,14.062 101.037,14.32 101.21,14.32 101.766,14.877 112.292,14.877 113.381,15.966 113.381,16.586 114.026,17.231 114.026,18.87 v1(114.742,19.586) ; C45.2@108.021,40.565 108.174,40.412 TP8.1@108.174,39.023 C44.1@110.325,39.023 ; v1(113.778,39.937) 113.778,40.307 IC23.5@113.917,40.446 ; IC22.5@113.894,36.965 113.894,36.499 114.123,36.27 114.215,36.27 114.958,35.527 115.597,35.527 115.744,35.381 115.815,35.381 115.961,35.234 115.961,33.406 115.136,32.58 115.136,29.208 114.369,28.44 114.369,24.249 114.304,24.184 114.304,21.576 114.394,21.486 114.394,20.99 v1(114.462,20.923) ; C42.2@119.74,41.985 119.794,41.93 v1(119.794,40.886)
  Top w0.254: IC23.5@113.844,40.519 112.628,40.519 112.267,40.88 R54.2@112.217,40.88 111.894,40.557 111.599,40.557 110.325,39.282 110.325,39.023 C44.1@110.325,39.007 111.634,39.007 112.242,39.616 112.292,39.616 113.056,38.852 113.056,37.528 113.619,36.965 IC22.5@113.894,36.965
  L3 w0.127: v1(114.462,20.923) 114.462,19.929 114.742,19.649 v1(114.742,19.586)
  Bot w0.127: v1(113.778,39.937) 115.296,41.456 119.199,41.456 119.768,40.886 v1(119.794,40.886)
RST: IC39.3 T11.1 | length 8.6
  Top w0.127: IC39.3@163.03,3.815 164.33,3.815 164.75,3.395 164.75,1.06
  Top w0.152: T11.1@162.38,-1.6 163.696,-1.6 164.75,-0.546 164.75,1.06
RSTn: D14.1 R93.1 | length 38.4
  Top w0.508: D14.1@158.25,5.6 v2(158.25,6.9) ; v2(184.93,-2.35) R93.1@186.46,-2.35
  Bot w0.508: v2@158.28,6.9 158.28,-0.6 160.174,-2.494 174.775,-2.494 175.647,-1.622 184.202,-1.622 v2(184.93,-2.35)
SDR_MODE: IC6.5 T9.1 | length 59.2
  Top w0.152: T9.1@120.129,15.317 v2(121.059,15.317) ; v2(150.823,20.556) 150.823,30.823 153.82,33.82 161.395,33.82 162.875,35.3 IC6.5@165.05,35.3
  L3 w0.152: v2(121.059,15.317) 122.717,15.317 127.956,20.556 v2(150.823,20.556)
SERVMOD_3V3: IC46.5 IC46.13 R98.1 R101.2 | length 18.5
  Top w0.254: R101.2@173.9,0.15 175.823,0.15 IC46.13@175.831,0.142 177.013,0.142 177.988,1.117 ; IC46.5@181.631,2.092 178.963,2.092 177.988,1.117 ; R98.1@186.46,-0.55 185.412,-0.55 184.412,-1.55 180.655,-1.55 177.988,1.117
SHARED_BUS_0: R95.1
SHARED_BUS_1: R92.1
SHARED_BUS_2: R48.1
SHARED_BUS_3: R96.1
SHARED_BUS_4: R97.1
STRIP1: R50.2 | length 4.9
  Top w0.508: 12.444,-3.75 12.444,-2.084 12.978,-1.55 R50.2@15.48,-1.55
STRIP2: R49.1 | length 6.9
  Top w0.508: 95.649,-3.915 98.457,-3.915 98.819,-3.554 100.523,-1.85 R49.1@101.68,-1.85
STRIP3: R50.1 | length 107.8
  Top w0.508: R50.1@17.38,-1.55 v2(19.255,-1.55) v2(20.167,-1.55)
  L3 w0.508: v2(19.255,-1.55) v2(20.167,-1.55) 34.274,-1.55 34.975,-2.251 34.975,-3.495 35.53,-4.05 v2(122.53,-4.05)
  other v2: 121.305,-4.05
Switch_I2C.SCL: IC46.2 R121.2 | length 2.2
  Top w0.254: IC46.2@181.631,0.142 181.632,0.141 R121.2@183.793,0.141
Switch_I2C.SDA: IC46.3 R120.2 | length 3.6
  Top w0.203: IC46.3@181.631,0.792 v2(182.871,0.792)
  Top w0.254: IC46.3@181.631,0.792 182.841,0.792 183.231,1.182 R120.2@183.793,1.182
TERM_STAT0: IC3.4 R25.2 SW1A.2 T1.1 | length 187
  Top w0.203: T1.1@8.644,88.78 9.374,88.78 v1(9.474,88.88) R25.2@10.224,89.63 ; SW1A.2@30.986,79.05 32.716,79.05 v1(32.786,79.12) ; IC3.4@109.059,-0.52 109.194,-0.385 v1(109.194,4.13)
  L3 w0.203: v1(9.474,88.88) 15.287,88.88 18.694,85.473 18.694,81.63 21.194,79.13 32.776,79.13 v1(32.786,79.12) 32.786,70.113 37.319,65.58 37.319,9.043 37.791,8.571 37.803,8.571 37.844,8.53 54.232,8.53 54.462,8.76 57.217,8.76 65.267,0.71 104.024,0.71 107.444,4.13 v1(109.194,4.13)
TERM_STAT1: IC3.5 R27.2 SW1B.2 T2.1 | length 185.3
  Top w0.203: R27.2@12.194,88.66 12.144,88.61 T2.1@12.144,87.28 12.869,87.28 13.194,87.605 v1(13.194,88.13) ; SW1B.2@30.986,69.05 32.716,69.05 v1(32.786,69.12) ; IC3.5@110.329,-0.52 110.329,0.588 110.694,0.953 v1(110.694,3.88)
  L3 w0.203: v1(13.194,88.13) 15.385,88.13 18.33,85.185 18.33,81.277 20.025,79.582 20.807,78.8 31.449,78.8 32.456,77.793 32.456,69.976 32.786,69.646 v1(32.786,69.12) 36.844,65.062 36.844,9.03 37.956,7.918 54.087,7.918 54.599,8.429 57.08,8.429 65.261,0.248 104.348,0.248 107.751,3.651 110.465,3.651 v1(110.694,3.88)
TERM_STAT2: IC3.6 R29.2 SW1C.2 T3.1 | length 177.9
  Top w0.203: R29.2@15.944,88.66 15.894,88.61 15.894,87.08 16.394,86.58 v1(16.394,86.28) ; SW1C.2@30.999,59.006 32.729,59.006 v1(32.799,59.076) ; IC3.6@111.599,-0.52 111.694,-0.425 111.694,0.88 112.194,1.38 v1(112.194,3.38)
  L3 w0.203: v1(16.394,86.28) 16.9,85.774 16.9,71.533 29.357,59.076 v1(32.799,59.076) 32.799,49.825 36.474,46.15 36.474,8.6 37.639,7.436 54.072,7.436 54.735,8.099 56.944,8.099 65.159,-0.116 104.784,-0.116 108.221,3.321 112.135,3.321 v1(112.194,3.38)
TERM_STAT3: IC3.7 R31.2 SW1D.2 T4.1 | length 181.1
  Top w0.203: v1(16.394,85.38) 17.294,85.38 17.869,85.955 18.944,85.955 19.33,86.341 R31.2@19.33,88.78 ; SW1D.2@30.986,49.05 32.716,49.05 v1(32.786,49.12) ; IC3.7@112.869,-0.52 112.944,-0.445 112.944,1.13 113.194,1.38 v1(113.194,2.88)
  L3 w0.203: v1(16.394,85.38) 16.394,71.38 29.177,58.597 32.468,58.597 32.468,49.437 32.716,49.19 32.716,49.05 v1(32.786,49.12) 36.144,45.762 36.144,8.255 37.348,7.051 54.154,7.051 54.872,7.769 56.807,7.769 65.022,-0.446 105.368,-0.446 108.694,2.88 v1(113.194,2.88)
TERM_STAT4: IC3.9 R33.2 SW1E.2 T5.1 | length 167.6
  Top w0.203: T5.1@14.38,5.1 v2(14.38,6.18) ; R33.2@14.43,4.12 T5.1@14.43,5.1 ; SW1E.2@30.986,39.05 32.716,39.05 v1(32.786,39.12) ; v1(113.944,2.13) 113.944,8.585 IC3.9@114.139,8.78
  L3 w0.203: v2(14.38,6.18) 14.38,18.316 31.369,35.305 31.369,38.205 32.284,39.12 v1(32.786,39.12) 35.769,36.137 35.769,26.604 35.774,26.599 35.774,16.325 35.769,16.32 35.769,8.155 37.203,6.721 54.291,6.721 55.009,7.439 56.67,7.439 64.885,-0.777 105.973,-0.777 109.189,2.439 112.812,2.439 113.121,2.13 v1(113.944,2.13)
TERM_STAT5: IC3.10 R36.2 SW1F.2 T6.1 | length 147.8
  Top w0.203: T6.1@17.98,5.1 T6.1@17.98,5.2 ; v2(17.98,6.18) T6.1@17.98,5.2 ; R36.2@18.03,4.12 18.03,5.15 T6.1@17.98,5.2 ; SW1F.2@30.986,29.05 32.716,29.05 v1(32.786,29.12) ; v1(112.694,1.88) 112.694,8.605 IC3.10@112.869,8.78
  L3 w0.203: v2(17.98,6.18) 17.98,18.416 28.634,29.07 32.736,29.07 v1(32.786,29.12) 35.286,26.62 35.286,7.988 36.884,6.39 54.428,6.39 55.146,7.109 56.533,7.109 64.749,-1.107 106.568,-1.107 109.784,2.109 111.642,2.109 111.871,1.88 v1(112.694,1.88)
TERM_STAT6: IC3.11 R39.2 SW1G.2 T7.1 | length 142.4
  Top w0.203: T7.1@6.68,5.1 6.63,5.05 R39.2@6.63,4.02 v2(7.344,4.02) ; SW1G.2@30.986,19.05 32.716,19.05 v1(32.786,19.12) ; v1(111.444,1.63) 111.599,1.785 IC3.11@111.599,8.78
  L3 w0.203: v2(7.344,4.02) 8.454,5.13 17.944,5.13 18.965,6.151 18.965,16.401 21.734,19.17 32.736,19.17 v1(32.786,19.12) 34.419,17.487 34.419,8.28 36.639,6.06 57.115,6.06 64.612,-1.437 106.877,-1.437 109.944,1.63 v1(111.444,1.63)
TERM_STAT7: IC3.12 R43.2 SW1H.2 T8.1 | length 118.6
  Top w0.203: R43.2@10.53,4.02 v2(11.244,4.02) ; T8.1@10.58,5.2 10.63,5.15 R43.2@10.63,4.12 ; SW1H.2@30.986,9.05 32.716,9.05 v1(32.786,9.12) ; v1(110.194,1.13) 110.194,8.645 IC3.12@110.329,8.78
  L3 w0.203: v2(11.244,4.02) 18.584,4.02 23.684,9.12 v1(32.786,9.12) 36.177,5.729 56.979,5.729 64.475,-1.767 108.047,-1.767 110.194,0.38 v1(110.194,1.13)
TS0: D3.1 R26.1 | length 13.9
  Top w0.127: D3.1@-3.49,79.3 -2.6,79.3 -1.9,80 5.8,80 8.13,82.33 R26.1@9.194,82.33
TS1: D4.1 R28.1 | length 34.5
  Top w0.127: v2(10.644,82.135) R28.1@10.644,83.28
  Bot w0.127: D4.1@-3.49,59.7 -2.5,60.69 -2.5,77.577 2.058,82.135 v2(10.644,82.135)
TS2: D19.1 R30.1 | length 20.6
  Top w0.203: v2(-1.9,79.3) 6.3,79.3 8.3,81.3 12.9,81.3 v2(13.9,82.3) 13.9,83.214 13.93,83.244 R30.1@13.894,83.28
  Bot w0.203: D19.1@-3.49,80.7 -2.594,80.7 -1.9,80.006 v2(-1.9,79.3)
TS3: D20.1 R32.1 | length 38.9
  Top w0.127: D20.1@-3.49,58.3 -2.2,58.3 2.3,62.8 2.3,73.5 9.7,80.9 14.639,80.9 v2(15.894,82.155) 18.144,82.155 R32.1@18.144,83.28
TS4: D21.1 R34.1 | length 56
  Top w0.127: 5.7,8.7 9.9,8.7 11.85,10.65 R34.1@15.33,10.65 15.33,13.57 v2(15.057,13.843)
  Bot w0.203: D21.1@-3.49,38.7 -2.454,38.7 -1.954,38.2 -1.954,35.346 -2.4,34.9 -2.4,26.8 -1.1,25.5 0.88,25.5 3.28,27.9 8,27.9 11.2,24.7 11.2,17.7 v2(15.057,13.843)
TS5: D23.1 R37.1 | length 49.5
  Top w0.203: D23.1@-3.49,37.3 v2(-2.504,37.3) ; R37.1@18.93,10.65 v2(20.23,10.65)
  Bot w0.203: v2(-2.504,37.3) -2.504,36.296 -3,35.8 -3,25.791 -2.109,24.9 1.469,24.9 3.469,26.9 7.4,26.9 10.255,24.045 v2(10.255,23.6) 10.255,16.645 16.25,10.65 v2(20.23,10.65)
TS6: D25.1 R40.1 | length 15.7
  Top w0.254: v2(3.424,8.749) 3.43,8.743 R40.1@3.43,7.45
  Bot w0.127: D25.1@-3.49,17.7 1,17.7 3.424,15.276 v2(3.424,8.749)
pads on no net: D12.5 D13.5 D18.5 FTG1.FTG2 FTG2.1 FTG3.1 FTG4.1 IC3.13 IC12.5 IC18.5 IC25.9 IC28.4 IC31.4 IC41.4 IC43.7 IC44.7 J8.B1 J8.L2 J9.A3 J9.A5 J9.A7 J9.A8 J9.B2 J9.B3 J9.B4 J9.B5 J9.B6 J9.B7 J9.B8 J9.C2 J9.C4 J9.C6 J9.C8 J9.D3 J9.D5 J9.D7 J9.D8 J9.E2 J9.E3 J9.E4 J9.E5 J9.E6 J9.E7 J9.E8 J9.F2 J9.F4 J9.F6 J9.F8 J9.G3 J9.G5 J9.G7 J9.H2 J9.H3 J9.H4 J9.H5 J9.H6 J9.H7 J9.H8 J9.I2 J9.I4 J9.I6 J9.I8 J9.J3 J9.J5 J9.J7 J9.K2 J9.K3 J9.K4 J9.K5 J9.K6 J9.K7 J9.K8 J9.L2 J9.L4 J9.L6 J9.L8 J10.5 M1.1 M2.1 Standoff1.1 Standoff2.1

## Polygon pours and split planes (outlines as drawn)
no net on Top "ML1_BAL" (solid, pour order 26): -3.226,94.18 155.894,94.18 155.894,-4.42 -2.932,-4.42
GND on Top "GND_L01_P034" (solid, remove dead copper, pour order 34): 198.431,47.15 198.431,41.225 216.206,41.225 216.206,47.15
NetC52_1 on Top "Top Overlay-No Net" (solid, remove dead copper, pour order 2): 154.457,71.68 154.457,60.17 146.863,60.17 146.863,64.463 146.863,65.742 146.863,71.68
N12V0A on Top "ML1_BAL" (solid, remove dead copper, pour order 18): 113.28,22.755 113.28,15.601 105.894,15.601 105.894,22.38 106.469,22.955 106.519,23.005 113.044,23.005
P12V0A on Top "ML1_BAL" (solid, remove dead copper, pour order 20): 112.619,49.63 112.619,51.23 111.344,52.505 110.494,53.355 106.244,53.355 105.769,53.355 105.044,52.63 104.869,52.455 104.869,47.48 104.869,46.355 105.544,45.68 106.594,44.63 106.594,43.755 106.594,43.53 107.269,42.855 109.394,42.855 109.569,42.855 109.969,43.255 109.994,43.28 109.994,44.73 109.994,49.105 110.394,49.505 110.469,49.58 112.569,49.58
NetC36_1 on Top "esd1" (solid, pour order 28): -2.752,1.525 4.373,1.525 4.373,-3 36.998,-3 36.998,-4.5 -2.752,-4.5
STRIP2 on Top "esd1" (solid, pour order 30): 79.931,-4.55 96.998,-4.55 96.998,-3.281 41.998,-3.281 41.998,-4.55
STRIP3 on Top "STRIP3_L01_P029" (solid, pour order 29): 214.531,-4.55 214.548,-4.55 215.788,-3.31 116.998,-3.31 116.998,-4.55
P12V0 on Bot "NONET_L06_P-001" (solid, remove dead copper, pour order 25): 171.083,18.44 171.083,24.698 188.651,24.698 191.037,22.312 191.956,22.312 192.573,22.775 192.592,25.186 196.458,25.186 196.458,18.492
P12V0_DIOT on Bot "P12V0_DIOT_L04_P036" (solid, pour order 36): 215.541,-0.159 215.541,-3.31 189.942,-3.31 189.942,0.002
GND on Bot "GND_L04_P033" (solid, remove dead copper, pour order 33): 198.431,47.15 198.431,41.225 216.206,41.225 216.206,47.15
no net on Bot "ML1_BAL" (solid, pour order 24): -3.226,94.18 155.894,94.18 155.894,-4.42 -2.932,-4.42
N12V0A on Bot "ML1_BAL" (solid, remove dead copper, pour order 4): 59.962,84.398 59.962,4.362 62.694,1.63 68.944,1.63 85.944,1.63 85.944,4.88 69.244,4.88 62.87,4.88 61.944,5.806 61.944,14.13 61.944,84.38 61.694,84.63 60.194,84.63
P12V0A on Bot "ML1_BAL" (solid, remove dead copper, pour order 6): 63.944,5.13 62.944,5.13 62.444,5.63 62.194,5.88 62.194,7.206 62.194,84.88 62.944,85.63 65.944,88.63 77.444,88.63 81.544,88.63 82.694,87.48 82.694,84.63 82.694,11.13 82.194,10.63 81.694,10.63 81.303,10.63 79.194,12.739 79.194,83.88 78.944,84.13 78.694,84.38 71.694,84.38 70.194,84.38 69.694,83.88 69.422,83.608 65.944,83.608 65.922,83.608 65.444,83.13 65.444,6.63 63.944,5.13 63.194,5.13
NetC36_1 on Bot "esd1" (solid, pour order 27): -2.752,0.94 4.373,0.94 4.373,-3 36.998,-3 36.998,-4.5 -2.752,-4.5
STRIP2 on Bot "esd1" (solid, pour order 32): 79.931,-4.55 96.998,-4.55 96.998,-3.281 41.998,-3.281 41.998,-4.55
STRIP3 on Bot "STRIP3_L04_P031" (solid, pour order 31): 214.531,-4.55 214.548,-4.55 215.788,-3.31 116.998,-3.31 116.998,-4.55
N12V0A on Bot "ML1_BAL" (solid, remove dead copper, pour order 10): 84.444,77.38 84.809,77.38 85.944,76.245 85.944,4.88 84.944,3.88 83.944,3.88 83.444,4.38 83.269,4.555 83.269,8.088 83.269,77.205 83.444,77.38
P3V3 on L3 "7" (solid, remove dead copper, pour order 12): 170.776,9.1 178.561,9.1 178.561,-2.178 99.444,-2.178 96.444,0.822 96.444,47.822 101.444,52.822 130.444,52.822 160.162,52.822 167.899,60.559 188.63,60.559 188.63,17.292 178.561,17.292 178.561,24.865 170.776,24.865
P12V0 on L3 "ML1_BAL" (solid, remove dead copper, pour order 35): 148.83,54.255 148.83,61.35 158.03,61.35 158.03,91.591 197.658,91.591 197.658,9.45 170.776,9.45 170.776,24.865 178.561,24.865 178.561,16.622 189.983,16.622 189.983,62.35 168.066,62.35 159.971,54.255
GND on L3 "0" (solid, remove dead copper, pour order 14): 156.769,61.861 148.36,61.861 148.36,54.255 100.244,54.255 95.369,49.38 95.369,-4.645 -2.081,-4.645 -2.893,-3.833 -3.267,94.405 156.769,94.405
P12V0_DIOT on L3 "P12V0_DIOT_L03_P022" (solid, pour order 22): 215.541,0.4 215.541,-3.35 189.983,-3.35 189.983,14.616 197.658,14.616 197.658,0.895 198.153,0.4
GND on GP1(GND) (split plane): 215.959,92.239 215.959,-3.339 214.258,-5.04 118.625,-5.04 118.625,-3.05 118.616,-3.001 118.588,-2.96 118.547,-2.932 118.498,-2.923 40.801,-2.923 38.588,-0.71 38.547,-0.682 38.498,-0.673 36.498,-0.673 36.449,-0.682 36.408,-0.71 36.38,-0.751 36.371,-0.8 36.371,-5.04 -3.06,-5.04 -3.06,3.65 -3.069,3.75 -3.098,3.845 -3.146,3.934 -3.209,4.011 -3.286,4.074 -3.375,4.122 -3.47,4.151 -3.57,4.16 -4.19,4.16 -4.19,82.695 -4.19,83.684 -3.209,84.664 -3.146,84.742 -3.098,84.83 -3.069,84.926 -3.06,85.025 -3.06,93.94 110.207,93.94 110.207,79.836 110.457,79.586 110.457,62.586 120.113,52.93 135.844,52.93 135.844,54.355 120.438,54.355 111.207,63.586 111.207,81.2 111.207,93.94 214.258,93.94
GND on GP1(GND) (split plane): 40.658,-3.14 40.686,-3.159 40.699,-3.168 40.748,-3.177 118.371,-3.177 118.371,-5.04 36.625,-5.04 36.625,-0.927 38.445,-0.927

## Keep-outs
Top:
  lines w0.1: 2.519,3.005 2.519,1.705 2.719,1.505 2.719,0.98
L3:
  lines w0.1: 2.519,-2.095 2.519,-0.62 2.719,-0.42 2.719,1.548 2.519,1.748 2.519,2.983 ; 2.769,86.405 2.769,91.855
Bot:
  lines w0.1: 2.519,-2.07 2.519,-0.695 2.794,-0.42 2.794,1.355 2.519,1.63 2.519,2.98 ; 2.769,87.98 2.769,90.73
KeepOutLayer:
  drawing of 3479 lines, arcs and shapes, not listed

## Other copper
Top:
  rectangle net NetC36_1: 0.794,0.139 4.969,0.78
  rectangle net NetC34_1: 1.78,89.02 4.894,89.523
  region net NetC34_1: 4.104,87.002 4.104,89.405 3.601,89.405 3.601,87.002
  rectangle net GND: 15.644,90.655 16.194,91.105
  rectangle net GND: 95.694,45.53 96.119,45.921
  rectangle net GND: 81.519,86.63 81.919,87.105
  rectangle net GND: 108.894,22.33 109.444,22.63
  rectangle net GND: 119.469,38.656 119.919,39.28
  rectangle net GND: 109.119,66.48 110.119,66.955
  rectangle net GND: 111.419,76.905 113.444,80.08
  rectangle net GND: 122.069,61.655 122.53,62.08
  rectangle net GND: 138.916,58.068 139.366,58.558
  rectangle net GND: 143.644,56.922 144.069,57.355
  rectangle net N12V0A: 107.172,18.884 107.657,19.384
  rectangle net P6V0: 130.141,58.87 130.277,59.163
  rectangle net P6V0: 130.166,59.87 130.316,60.17
  rectangle net NetC52_1: 135.191,63.97 135.475,64.486
  rectangle net NetIC36_43: 96.919,46.13 97.269,46.63
  rectangle net P3V3: 131.841,51.872 136.591,52.872
  rectangle net ADC_IN_P0: 38.569,82.68 46.769,85.605
  rectangle net ADC_IN_P1: 38.569,72.72 46.769,75.645
  rectangle net ADC_IN_P2: 38.582,62.636 46.782,65.561
  rectangle net ADC_IN_P3: 38.569,52.68 46.769,55.605
  rectangle net ADC_IN_P4: 38.569,42.68 46.769,45.605
  rectangle net ADC_IN_P5: 38.569,32.68 46.769,35.605
  rectangle net ADC_IN_P6: 38.569,22.68 46.769,25.605
  rectangle net ADC_IN_P7: 38.569,12.68 46.769,15.605
  rectangle net P5V0A: 100.269,29.78 101.019,31.155
  pour cut-out: 111.207,81.2 111.207,63.586 120.513,54.28 134.669,54.28 134.669,52.899 120.144,52.899 110.457,62.586 110.457,79.586 110.207,79.836 110.207,96.13 111.207,96.13
L3:
  rectangle net GND: 93.013,34.33 98.094,40.619
  rectangle net P5V0A: 100.094,29.955 100.844,31.055
  pour cut-out: 111.207,81.2 111.207,63.586 120.42,54.372 134.694,54.372 134.694,52.88 120.163,52.88 110.457,62.586 110.457,79.586 110.207,79.836 110.207,96.086 111.207,96.086
Bot:
  rectangle net N13V0: 110.302,18.655 110.535,19.799
  rectangle net N13V0: 108.644,17.545 110.535,19.799
  rectangle net P12V0: 145.147,55.505 146.452,56.82
  pour cut-out: 111.207,81.2 111.207,63.586 120.438,54.355 134.444,54.355 134.444,52.93 120.113,52.93 110.457,62.586 110.457,79.586 110.207,79.836 110.207,96.086 111.207,96.086
GP1(GND) (plane layer: these items are gaps in the copper):
  pour cut-out: 111.207,81.2 111.207,63.586 120.438,54.355 135.844,54.355 135.844,52.93 120.113,52.93 110.457,62.586 110.457,79.586 110.207,79.836 110.207,96.086 111.207,96.086
  lines w0.25: 36.498,-5.3 36.498,-0.8 38.498,-0.8 40.748,-3.05 118.498,-3.05 118.498,-5.3
  lines w0.5: 198.438,18.698 198.713,18.973 198.713,18.473